# Altium PCB Socket.PcbDoc
Units mil, origin at the board's own origin, x right, y up, seen from the top; angles counter-clockwise.
Board outline 10039.37 x 4309.29 mil, 2 copper layers (Top Layer, Bottom Layer); 56 components, 65 nets, 543 pads, 0 vias.
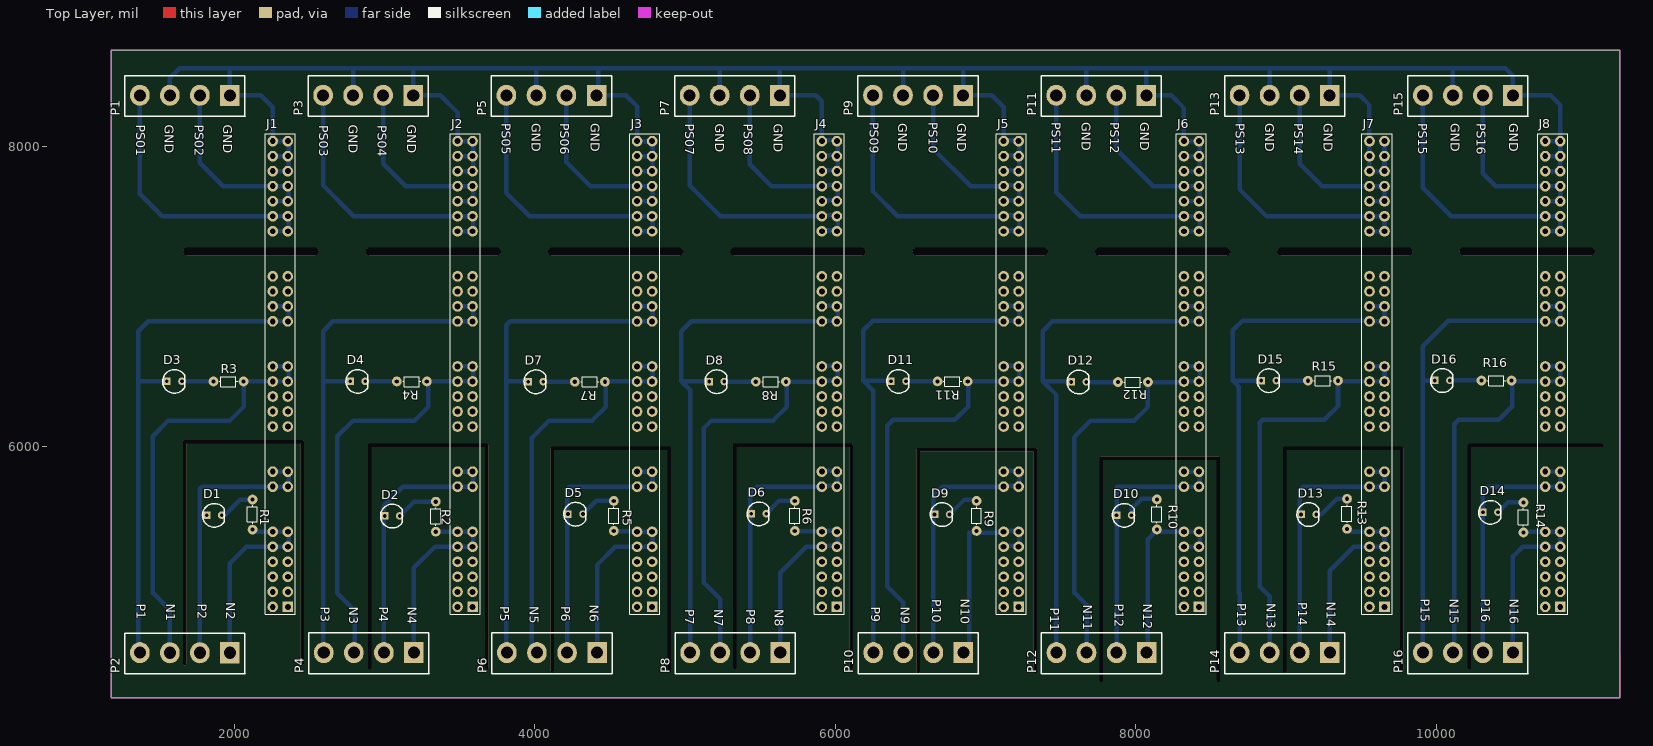
[diagram p0: Top Layer view]
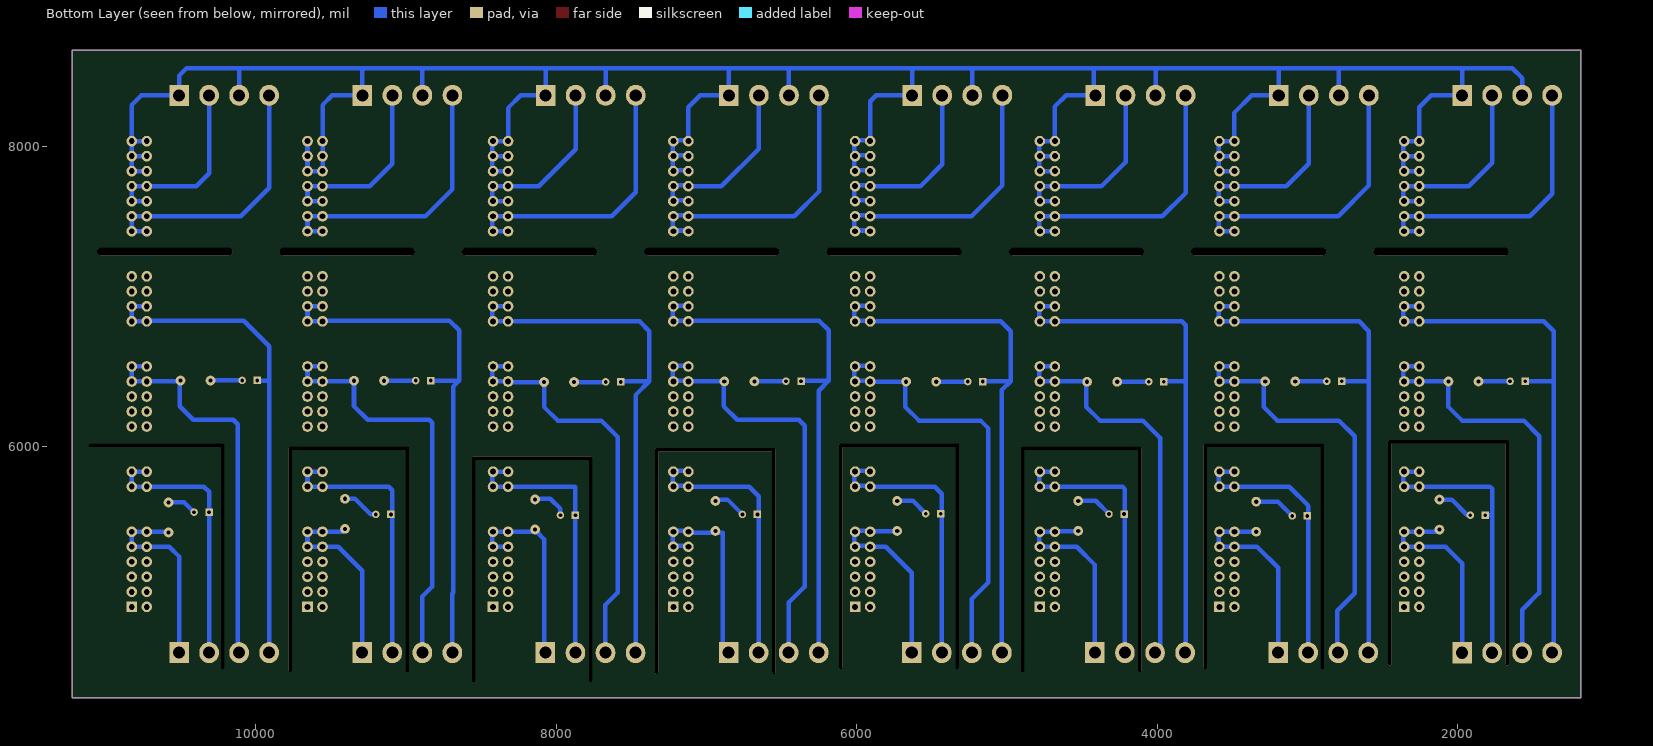
[diagram p1: Bottom Layer view, seen from below]

## Layer stack, top to bottom
Top Solder: solder mask 0.4, Solder Resist, Dk 3.5
Top Layer: signal copper 1.4
Dielectric 1: dielectric 12.6, FR-4, Dk 4.8
Bottom Layer: signal copper 1.4
Bottom Solder: solder mask 0.4, Solder Resist, Dk 3.5

## Board outline
1181.1,4330.71 1181.1,8640 11220.47,8640 11220.47,4330.71

## Design rules (kind name [scope] priority, off if disabled: settings)
Clearance [All] p1: gap=20 ignorepadtopadclearanceinfootprint=FALSE except(0: Arc-Hole Track-Hole SMDPad-Hole THPad-Hole Via-Hole Fill-Hole Poly-Hole Region-Hole Text-Hole)
PolygonConnect [All] p1: connectstyle=Relief reliefconductorwidth=10 reliefentries=4 polygonreliefangle="45 Angle" airgapwidth=10
RoutingVias [All] p1: holewidth=28 width=50 viastyle="Through Hole" minholewidth=28 minwidth=50 maxholewidth=28 maxwidth=50
SolderMaskExpansion [All] p1: expansion=4
Width [All] p1: maxlimit=100 minlimit=10 preferedwidth=30
30 further rules are at their usual default settings.

## Components (designator, comment, footprint, x,y, rotation, side; value= is the part's Value field where it differs from the comment)
D1 "LED 3mm" "Led 3mm" 1815,5545 r0 top
D2 "LED 3mm" "Led 3mm" 3000,5540 r0 top
D3 "LED 3mm" "Led 3mm" 1550,6436.33 r0 top
D4 "LED 3mm" "Led 3mm" 2770,6436.33 r0 top
D5 "LED 3mm" "Led 3mm" 4220,5552.67 r0 top
D6 "LED 3mm" "Led 3mm" 5440,5555 r0 top
D7 "LED 3mm" "Led 3mm" 3955,6434 r0 top
D8 "LED 3mm" "Led 3mm" 5160,6434.67 r0 top
D9 "LED 3mm" "Led 3mm" 6660,5550 r0 top
D10 "LED 3mm" "Led 3mm" 7871.43,5545 r0 top
D11 "LED 3mm" "Led 3mm" 6370,6436.67 r0 top
D12 "LED 3mm" "Led 3mm" 7570,6432.33 r0 top
D13 "LED 3mm" "Led 3mm" 9100,5550 r0 top
D14 "LED 3mm" "Led 3mm" 10310,5565 r0 top
D15 "LED 3mm" "Led 3mm" 8835,6441.33 r0 top
D16 "LED 3mm" "Led 3mm" 9990,6442 r0 top
J1 "Header 32x2" Header32x2 2355,4935 r90 top
J2 "Header 32x2" Header32x2 3585,4935 r90 top
J3 "Header 32x2" Header32x2 4780,4935 r90 top
J4 "Header 32x2" Header32x2 6010,4935 r90 top
J5 "Header 32x2" Header32x2 7220,4935 r90 top
J6 "Header 32x2" Header32x2 8420,4935 r90 top
J7 "Header 32x2" Header32x2 9655,4935 r90 top
J8 "Header 32x2" Header32x2 10825,4935 r90 top
P1 "Header 4" CON4#1 1970,8340 r180 top
P2 "Header 4" CON4#2 1970,4629.29 r180 top
P3 "Header 4" CON4#1 3190,8340 r180 top
P4 "Header 4" CON4#1 3194.29,4630 r180 top
P5 "Header 4" CON4#1 4410,8340 r180 top
P6 "Header 4" CON4#1 4413.57,4630 r180 top
P7 "Header 4" CON4#1 5630,8340 r180 top
P8 "Header 4" CON4#1 5632.86,4630 r180 top
P9 "Header 4" CON4#1 6850,8340 r180 top
P10 "Header 4" CON4#1 6852.14,4630 r180 top
P11 "Header 4" CON4#1 8070,8340 r180 top
P12 "Header 4" CON4#1 8071.43,4630 r180 top
P13 "Header 4" CON4#1 9290,8340 r180 top
P14 "Header 4" CON4#1 9290.71,4630 r180 top
P15 "Header 4" CON4#1 10510,8340 r180 top
P16 "Header 4" CON4#1 10510,4630 r180 top
R1 "Res1" R1/8W 2120.47,5549.03 r90 top
R2 "Res1" R1/8W 3340,5535 r90 top
R3 "Res1" R1/8W 1960.47,6435.36 r180 top
R4 "Res1" R1/8W 3180.47,6435.36 r180 top
R5 "Res1" R1/8W 4525,5540 r90 top
R6 "Res1" R1/8W 5730,5540 r90 top
R7 "Res1" R1/8W 4365.47,6433.03 r180 top
R8 "Res1" R1/8W 5570.47,6433.69 r180 top
R9 "Res1" R1/8W 6940,5540 r90 top
R10 "Res1" R1/8W 8140,5550 r90 top
R11 "Res1" R1/8W 6780.47,6435.69 r180 top
R12 "Res1" R1/8W 7980.47,6431.36 r180 top
R13 "Res1" R1/8W 9405.47,5554.03 r90 top
R14 "Res1" R1/8W 10580,5530 r90 top
R15 "Res1" R1/8W 9245.47,6440.36 r180 top
R16 "Res1" R1/8W 10400.47,6441.03 r180 top

## Footprints (in the part's own frame and the unit in brackets; to place one, negate y for a bottom-side part, rotate by r counter-clockwise, add the part's x,y. Pads: shape width x height; smd on the part's side, far side on the other; paste and mask are expansions set on the pad)
CON4#1 [mil] "CON4 5.08"
  rect 130x140 hole 80: 1(0,0)
  oval 130x140 hole 80: 2(200,0) 3(400,0) 4(600,0)
  silkscreen extent -101,-131 700,141
CON4#2 [mil] "CON4 5.08"
  rect 130x140 hole 80: 1(0,0)
  oval 130x140 hole 80: 2(200,0) 3(400,0) 4(600,-0.71)
  silkscreen extent -101,-131 700,141
Header32x2 [mm] "Header32x2 - 16"
  rect 1.8x1.8 hole 1: 1(0,0)
  round 1.8 hole 1: 2(2.54,0) 3(5.08,0) 4(7.62,0) 5(10.16,0) 6(12.7,0) 9(20.32,0) 10(22.86,0) 13(30.48,0) 14(33.02,0) 15(35.56,0) 16(38.1,0) 17(40.64,0) 20(48.26,0) 21(50.8,0) 22(53.34,0) 23(55.88,0) 26(63.5,0) 27(66.04,0) 28(68.58,0) 29(71.12,0) 30(73.66,0) 31(76.2,0) 32(78.74,0) 33(0,2.54) 34(2.54,2.54) 35(5.08,2.54) 36(7.62,2.54) 37(10.16,2.54) 38(12.7,2.54) 41(20.32,2.54) 42(22.86,2.54) 45(30.48,2.54) 46(33.02,2.54) 47(35.56,2.54) 48(38.1,2.54) 49(40.64,2.54) 52(48.26,2.54) 53(50.8,2.54) 54(53.34,2.54) 55(55.88,2.54) 58(63.5,2.54) 59(66.04,2.54) 60(68.58,2.54) 61(71.12,2.54) 62(73.66,2.54) 63(76.2,2.54) 64(78.74,2.54)
  silkscreen extent -1.27,-1.27 80.01,3.81
"Led 3mm" [mil]
  rect 50x50 hole 25: 1(0,0)
  round 50 hole 25: 2(100,0)
  silkscreen extent -28,-80 118,78
R1/8W [mil] "R 1/8W, 2 pin, 200mil"
  round 65 hole 28: 1(-100,0) 2(100,0)
  silkscreen extent -60,-32 61,34, body extent -135,-35 135,37, height 86

## Part data
D1 D2 D3 D4 D5 D6 D7 D8 D9 D10 D11 D12 D13 D14 D15 D16: library part LED0, "Typical INFRARED GaAs LED"
P1 P2 P3 P4 P5 P6 P7 P8 P9 P10 P11 P12 P13 P14 P15 P16: "Header, 4-Pin"
R1 R2 R3 R4 R5 R6 R7 R8 R9 R10 R11 R12 R13 R14 R15 R16: "Resistor"

## Free pads (board coordinates)
  oval 900x50 hole 50 slot 900 at 0 deg: 0(2110,7300) 0(4537.14,7300) 0(6964.29,7300) 0(9391.43,7300) 1(3323.57,7300) 1(5750.71,7300) 1(8177.86,7300) 1(10605,7300)
  oval 20x1500 hole 20 slot 1500 at 90 deg: 1(1670,5295) 1(2450,5295) 1(2900,5270) 1(3680,5270) 1(4115,5250) 1(4895,5250) 1(5330,5270) 1(6105,5270) 1(6550,5240) 1(7330,5240) 1(7770,5185) 1(8550,5185) 1(8990,5250) 1(9770,5250) 1(10220,5270)
  oval 800x20 hole 20 slot 800 at 0 deg: 1(2060,6035) 1(3290,6010) 1(4505,5990) 1(5715,6010) 1(6940,5980) 1(8160,5925) 1(9380,5990)
  oval 900x20 hole 20 slot 900 at 0 deg: 1(10660,6010)

## Nets (pads, with @x,y where several pads share a name; then routed paths per layer and width w, separated by ;. In a path a pad name is that pad's centre, name@x,y a point inside that pad or via, vN(x,y) a via of type N, cw(c..) or ccw(c..) an arc to the next point about the centre after c; other vN are vias at no path point)
GND: J1.30 J1.31 J1.32 J1.62 J1.63 J1.64 J2.30 J2.31 J2.32 J2.62 J2.63 J2.64 J3.30 J3.31 J3.32 J3.62 J3.63 J3.64 J4.30 J4.31 J4.32 J4.62 J4.63 J4.64 J5.30 J5.31 J5.32 J5.62 J5.63 J5.64 J6.30 J6.31 J6.32 J6.62 J6.63 J6.64 J7.30 J7.31 J7.32 J7.62 J7.63 J7.64 J8.30 J8.31 J8.32 J8.62 J8.63 J8.64 P1.1 P1.3 P3.1 P3.3 P5.1 P5.3 P7.1 P7.3 P9.1 P9.3 P11.1 P11.3 P13.1 P13.3 P15.1 P15.3 | length 20094.3
  Bottom Layer w30: P1.3 1570,8455 1635,8520 1970,8520 ; J1.64 2255,8260 2175,8340 P1.1 1970,8520 ; J1.62@2260,7835 J1.30 2360,7835 J1.31@2360,7935 ; J1.63@2260,7935 J1.31 J1.31@2360,7935 ; J1.64@2260,8035 J1.32 2360,8035 J1.31@2360,7935 ; P3.3 2790,8515 2795,8520 ; 3190,8515 P3.1 3370,8340 3485,8225 J2.64 ; J2.62@3490,7835 J2.30 3590,7835 J2.31@3590,7935 ; J2.63@3490,7935 J2.31 J2.31@3590,7935 ; J2.64@3490,8035 J2.32 3590,8035 J2.31@3590,7935 ; P5.3 4010,8515 4015,8520 ; J3.64 4680,8265 4605,8340 P5.1 4420,8350 4420,8520 ; J3.62@4685,7835 J3.30 4785,7835 J3.31@4785,7935 ; J3.63@4685,7935 J3.31 J3.31@4785,7935 ; J3.64@4685,8035 J3.32 4785,8035 J3.31@4785,7935 ; P7.3 5230,8520 ; J4.64 5910,8300 5870,8340 P7.1 5630,8510 5620,8520 ; J4.62@5915,7840 6015,7840 J4.31@6015,7940 ; J4.63@5915,7940 J4.31@6015,7940 ; J4.64@5915,8040 6015,8040 J4.31@6015,7940 ; P9.3 6450,8515 6455,8520 ; J5.64 7120,8260 7040,8340 P9.1 6850,8515 6855,8520 ; J5.62@7125,7840 7225,7840 J5.31@7225,7940 ; J5.63@7125,7940 J5.31@7225,7940 ; J5.64@7125,8040 7225,8040 J5.31@7225,7940 ; P11.3 7670,8520 ; J6.64 8320,8255 8235,8340 P11.1 8070,8515 8075,8520 ; J6.62@8325,7835 J6.30 8425,7835 J6.31@8425,7935 ; J6.63@8325,7935 J6.31 J6.31@8425,7935 ; J6.64@8325,8035 J6.32 8425,8035 J6.31@8425,7935 ; P13.3 8890,8510 8900,8520 ; J7.32 J7.31 J7.30 J7.62 J7.63 J7.64 9555,8275 9490,8340 P13.1 9290,8505 9275,8520 ; P15.3 10110,8515 10105,8520 ; J8.62 J8.30 J8.31 ; J8.63 J8.31 ; J8.64 J8.32 ; 1970,8520 2795,8520 ; 2795,8520 4015,8520 ; 4015,8520 4420,8520 ; 4420,8520 5230,8520 ; 5230,8520 5620,8520 ; 5620,8520 6455,8520 ; 6455,8520 6855,8520 ; 6855,8520 7670,8520 ; 7670,8520 8075,8520 ; 8075,8520 8900,8520 ; 8900,8520 9275,8520 ; 9275,8520 10105,8520 ; 10105,8520 10460,8520 10510,8470 P15.1 10760,8340 10825,8275 J8.32 ; J8.31 J8.32
N01: J1.16 J1.17 J1.48 J1.49 P2.3 R3.1 | length 2849.3
  Bottom Layer w30: 1455,5025 1455,6070 1560,6175 1970,6175 2060.47,6265.47 R3.1 2254.64,6435.36 J1.48 J1.16@2360,6435 ; 1455,5030.07 1570,4915.07 ; P2.3 1570,4910 ; J1.49@2260,6535 2360,6535 J1.16@2360,6435 ; J1.16 J1.16@2360,6435
N02: J1.5 J1.6 J1.37 J1.38 P2.1 R1.1 | length 1367
  Bottom Layer w30: P2.1 1970,5225 2080,5335 J1.37 ; R1.1 2134.5,5435 J1.38 ; J1.38@2259.69,5434.69 2260,5435 J1.6 2360,5435 2360,5335 J1.5 J1.37@2260,5335
N03: J2.16 J2.17 J2.48 J2.49 P4.3 R4.1 | length 2849.3
  Bottom Layer w30: P4.3@2800,4629.29 2800,4910 2685,5025 2685,6070 2790,6175 3200,6175 3290.47,6265.47 R4.1@3290.47,6435.36 ; R4.1 3484.64,6435.36 J2.48 ; J2.48@3490,6435 J2.16 3590,6435 3590,6535 J2.49@3490,6535
N04: J2.5 J2.6 J2.37 J2.38 P4.1 R2.1 | length 1358.7
  Bottom Layer w30: P4.1 3194.29,5194.29 3335,5335 J2.37 ; R2.1 J2.38 ; J2.38@3489.69,5434.69 3490,5435 J2.6 3590,5435 3590,5335 J2.5 J2.37@3490,5335
N05: J3.16 J3.17 J3.48 J3.49 P6.3 R7.1 | length 2691.5
  Bottom Layer w30: P6.3@3980,4629.29 3980,6060 4095,6175 4380,6175 4470.47,6265.47 R7.1@4470.47,6435.36 ; R7.1 4467.45,6435 J3.48 ; J3.48@4685,6435 J3.16 4785,6435 4785,6535 J3.49@4685,6535
N06: J3.5 J3.6 J3.37 J3.38 P6.1 R5.1 | length 1351.4
  Bottom Layer w30: P6.1 4413.57,5213.57 4535,5335 J3.37 ; R5.1@4530,5436.69 4678.31,5436.69 J3.38 ; J3.38@4684.69,5434.69 4685,5435 J3.6 4785,5435 4785,5335 J3.5 J3.37@4685,5335
N07: J4.16 J4.17 J4.48 J4.49 P8.3 R8.1 | length 2858.3
  Bottom Layer w30: P8.3 5232.86,4987.14 5125,5095 5125,6125 5175,6175 5585,6175 5675.47,6265.47 R8.1@5675.47,6435.36 ; R8.1 5908.69,6433.69 J4.48 ; J4.48@5915,6440 6015,6440 6015,6540 J4.49@5915,6540
N08: J4.5 J4.6 J4.37 J4.38 P8.1 R6.1 | length 1363.8
  Bottom Layer w30: P8.1 5632.86,5162.86 5805,5335 J4.37 ; R6.1 5732.64,5437.36 5907.64,5437.36 J4.38 ; J4.38@5914.69,5439.69 5915,5440 6015,5440 6015,5340 J4.37@5915,5340
N09: J5.16 J5.17 J5.48 J5.49 P10.3 R11.1 | length 2858.6
  Bottom Layer w30: P10.3 6450,4632.14 6450,4965 6345,5070 6345,6140 6385,6180 6795,6180 6885.47,6270.47 R11.1@6885.47,6440.36 ; R11.1 7119.31,6435.69 J5.48 ; J5.48@7125,6440 7225,6440 7225,6540 J5.49@7125,6540
N10: J5.5 J5.6 J5.37 J5.38 P10.1 R9.1 | length 1347.8
  Bottom Layer w30: P10.1 6890,4667.86 6890,5429.36 7114.36,5429.36 J5.38 ; J5.38@7124.69,5439.69 7125,5440 7225,5440 7225,5340 J5.37@7125,5340
N11: J6.16 J6.17 J6.48 J6.49 P12.3 R12.1 | length 2753.2
  Bottom Layer w30: P12.3 7671.43,4948.57 7590,5030 7590,6065 7700,6175 7990,6175 8080.47,6265.47 R12.1@8080.47,6435.36 ; R12.1 8316.36,6431.36 J6.48 ; J6.48@8325,6435 J6.16 8425,6435 8425,6535 J6.49@8325,6535
N12: J6.5 J6.6 J6.37 J6.38 P12.1 R10.1 | length 1319.7
  Bottom Layer w30: P12.1 8080.47,4639.04 8080.47,5385.47 8130.03,5435.03 J6.38 ; J6.38@8324.69,5434.69 8325,5435 J6.6 8425,5435 8425,5335 J6.37@8325,5335
N13: J7.16 J7.17 J7.48 J7.49 P14.3 R15.1 | length 2805.1
  Bottom Layer w30: P14.3 8890.71,5004.29 8825,5070 8825,6160 8845,6180 9255,6180 9345.47,6270.47 R15.1 9350.83,6435 J7.48 J7.16 J7.17 J7.49
N14: J7.5 J7.6 J7.37 J7.38 P14.1 R13.1 | length 1306.5
  Bottom Layer w30: P14.1 9290.71,5175.71 9450,5335 J7.37 J7.5 J7.6 J7.38 R13.1@9424.5,5435
N15: J8.16 J8.17 J8.48 J8.49 P16.3 R16.1 | length 2648
  Bottom Layer w30: P16.3@10120,4634.29 10120,6150 10150,6180 10415,6180 10505.47,6270.47 R16.1@10505.47,6440.36 ; R16.1 10506.5,6435 J8.48 J8.16 J8.17 J8.49
N16: J8.5 J8.6 J8.37 J8.38 P16.1 R14.1 | length 1327.1
  Bottom Layer w30: P16.1 10510,5270 10575,5335 J8.37 J8.5 J8.6 J8.38 10724.69,5434.69 R14.1@10580,5434.69
NetD1_2: D1.2 R1.2 | length 248.6
  Bottom Layer w30: D1.2 1935,5545 2039.03,5649.03 R1.2
NetD2_2: D2.2 R2.2 | length 279.4
  Bottom Layer w30: D2.2 3195,5635 R2.2
NetD3_2: D3.2 R3.2 | length 210.9
  Bottom Layer w30: D3.2 1650.97,6435.36 R3.2
NetD4_2: D4.2 R4.2 | length 210.9
  Bottom Layer w30: D4.2 2870.97,6435.36 R4.2
NetD5_2: D5.2 R5.2 | length 241.2
  Bottom Layer w30: D5.2 4407.33,5640 R5.2
NetD6_2: D6.2 R6.2 | length 225.2
  Bottom Layer w30: D6.2 5625,5640 R6.2
NetD7_2: D7.2 R7.2 | length 210.9
  Bottom Layer w30: D7.2 4264.5,6434 R7.2
NetD8_2: D8.2 R8.2 | length 210.9
  Bottom Layer w30: D8.2 5260.97,6433.69 R8.2
NetD9_2: D9.2 R9.2 | length 221.6
  Bottom Layer w30: D9.2 6859.36,5649.36 R9.2@6940.47,5649.36
NetD10_2: D10.2 R10.2 | length 239.5
  Bottom Layer w30: D10.2 7971.43,5587.43 8039.03,5655.03 R10.2@8140.47,5655.03
NetD11_2: D11.2 R11.2 | length 210.9
  Bottom Layer w30: D11.2 6470.97,6435.69 R11.2
NetD12_2: D12.2 R12.2 | length 210.9
  Bottom Layer w30: D12.2 7670.97,6431.36 R12.2
NetD13_2: D13.2 R13.2 | length 248.6
  Bottom Layer w30: D13.2 9235,5550 9339.03,5654.03 R13.2
NetD14_2: D14.2 R14.2 | length 196.9
  Bottom Layer w30: D14.2 10475,5630 R14.2
NetD15_2: D15.2 R15.2 | length 210.9
  Bottom Layer w30: D15.2 8935.97,6440.36 R15.2
NetD16_2: D16.2 R16.2 | length 210.9
  Bottom Layer w30: D16.2 10299.5,6442 R16.2
P01: D3.1 J1.20 J1.21 J1.52 J1.53 P2.4 | length 3556.1
  Bottom Layer w30: 1360,6436.33 D3.1 ; P2.4 1360,4640 1360,6770 1425,6835 J1.52 ; J1.52@2260,6835 J1.20 2360,6835 2360,6935 J1.53@2260,6935
P02: D1.1 J1.9 J1.10 J1.41 J1.42 P2.2 | length 1921.9
  Bottom Layer w30: P2.2 1770,5720 1785,5735 J1.41 ; 1775,5545 D1.1 ; J1.41@2260,5735 J1.9 2360,5735 2360,5835 J1.42@2260,5835
P03: D4.1 J2.20 J2.21 J2.52 J2.53 P4.4 | length 3541.9
  Bottom Layer w30: P4.4@2590,4640 2590,6770 2655,6835 J2.52 ; 2590,6436.33 D4.1@2780,6436.33 ; J2.52@3490,6835 J2.20 3590,6835 3590,6935 J2.53@3490,6935
P04: D2.1 J2.9 J2.10 J2.41 J2.42 P4.2 | length 1822.1
  Bottom Layer w30: P4.2 2994.29,5609.29 3120,5735 J2.41 ; J2.41@3490,5735 J2.9 3590,5735 3590,5835 J2.42@3490,5835
P05: D7.1 J3.20 J3.21 J3.52 J3.53 P6.4 | length 3501.9
  Bottom Layer w30: P6.4@3770,4640 3810,4680 3810,6810 3835,6835 J3.52@4665,6835 ; 3810,6436.33 D7.1@3960,6436.33 ; J3.52@4685,6835 J3.20 4785,6835 4785,6935 J3.53@4685,6935
P06: D5.1 J3.9 J3.10 J3.41 J3.42 P6.2 | length 1861.8
  Bottom Layer w30: P6.2 4213.57,5718.57 4230,5735 J3.41 ; J3.41@4685,5735 J3.9 4785,5735 4785,5835 J3.42@4685,5835
P07: D8.1 J4.20 J4.21 J4.52 J4.53 P8.4 | length 3575.9
  Bottom Layer w30: P8.4 5032.86,6378.48 4975,6436.33 ; D8.1@5165,6436.33 4975,6436.33 ; 5870,6835 5040,6835 4975,6770 4975,6436.33 ; J4.52@5915,6840 6015,6840 6015,6940 J4.53@5915,6940
P08: D6.1 J4.9 J4.10 J4.41 J4.42 P8.2 | length 1854.5
  Bottom Layer w30: P8.2 5432.86,5687.86 5480,5735 J4.41 ; J4.41@5915,5740 6015,5740 6015,5840 J4.42@5915,5840
P09: D11.1 J5.20 J5.21 J5.52 J5.53 P10.4 | length 3584.7
  Bottom Layer w30: P10.4 6252.14,6374.19 6185,6441.33 ; D11.1@6375,6441.33 6185,6441.33 ; 7080,6840 6250,6840 6185,6775 6185,6441.33 ; J5.52@7125,6840 7225,6840 7225,6940 J5.53@7125,6940
P10: D9.1 J5.9 J5.10 J5.41 J5.42 P10.2 | length 1836
  Bottom Layer w30: P10.2 6652.14,5672.14 6715,5735 J5.41 ; J5.41@7125,5740 7225,5740 7225,5840 J5.42@7125,5840
P11: D12.1 J6.20 J6.21 J6.52 J6.53 P12.4 | length 3589.8
  Bottom Layer w30: P12.4 7471.43,6344.9 7380,6436.33 ; D12.1@7570,6436.33 7380,6436.33 ; 8275,6835 7445,6835 7380,6770 7380,6436.33 ; J6.52@8325,6835 J6.20 8425,6835 8425,6935 J6.53@8325,6935
P12: D10.1 J6.9 J6.10 J6.41 J6.42 P12.2 | length 1851.5
  Bottom Layer w30: P12.2 7871.43,5731.43 7875,5735 J6.41 ; J6.41@8325,5735 J6.9 8425,5735 8425,5835 J6.10 J6.42@8325,5835
P13: D15.1 J7.20 J7.21 J7.52 J7.53 P14.4 | length 3575.9
  Bottom Layer w30: P14.4 8690.71,5024.29 8685,5030 8685,6401.33 8645,6441.33 ; D15.1 8645,6441.33 ; J7.52@9540,6840 8710,6840 8645,6775 8645,6441.33 ; J7.52 J7.20 J7.21 J7.53
P14: D13.1 J7.9 J7.10 J7.41 J7.42 P14.2 | length 1855.1
  Bottom Layer w30: P14.2 9090.71,5710.71 9115,5735 J7.41 J7.9 J7.10 J7.42
P15: D16.1 J8.20 J8.21 J8.52 J8.53 P16.4 | length 3285.4
  Bottom Layer w30: P16.4 9910,6670 10080,6840 J8.52@10700,6840 ; 9910,6441.33 D16.1@9995,6441.33 ; J8.52 J8.20 J8.21 J8.53
P16: D14.1 J8.9 J8.10 J8.41 J8.42 P16.2 | length 1799.5
  Bottom Layer w30: P16.2 10310,5344.22 10310,5700 10345,5735 J8.41 J8.9 J8.10 J8.42
PS01: J1.26 J1.27 J1.58 J1.59 P1.4 | length 1902.1
  Bottom Layer w30: P1.4 1370,7685 1520,7535 J1.59 ; J1.58@2260,7435 2360,7435 2360,7535 J1.27 J1.59@2260,7535
PS02: J1.28 J1.29 J1.60 J1.61 P1.2 | length 1299.2
  Bottom Layer w30: P1.2 1770,7890 1925,7735 J1.61 ; J1.60@2260,7635 2360,7635 2360,7735 J1.29 J1.61@2260,7735
PS03: J2.26 J2.27 J2.58 J2.59 P3.4 | length 1879.9
  Bottom Layer w30: P3.4 2590,7740 2795,7535 J2.59 ; J2.58@3490,7435 3590,7435 3590,7535 J2.27 J2.59@3490,7535
PS04: J2.28 J2.29 J2.60 J2.61 P3.2 | length 1312.1
  Bottom Layer w30: P3.2 2990,7885 3140,7735 J2.61 ; J2.60@3490,7635 3590,7635 3590,7735 J2.29 J2.61@3490,7735
PS05: J3.26 J3.27 J3.58 J3.59 P5.4 | length 1884.2
  Bottom Layer w30: P5.4 3810,7690 3965,7535 J3.59 ; J3.58@4685,7435 4785,7435 4785,7535 J3.27 J3.59@4685,7535
PS06: J3.28 J3.29 J3.60 J3.61 P5.2 | length 1281.3
  Bottom Layer w30: P5.2 4210,7895 4370,7735 J3.61 ; J3.60@4685,7635 4785,7635 4785,7735 J3.29 J3.61@4685,7735
PS07: J4.26 J4.27 J4.58 J4.59 P7.4 | length 1864.9
  Bottom Layer w30: P7.4 5030,7740 5235,7535 J4.59 ; J4.58@5915,7440 6015,7440 6015,7540 J4.59@5915,7540
PS08: J4.28 J4.29 J4.60 J4.61 P7.2 | length 1300.1
  Bottom Layer w30: P7.2 5430,7880 5575,7735 J4.61 ; J4.60@5915,7640 6015,7640 6015,7740 J4.61@5915,7740
PS09: J5.26 J5.27 J5.58 J5.59 P9.4 | length 1878.3
  Bottom Layer w30: P9.4 6250,7700 6415,7535 J5.59 ; J5.58@7125,7440 7225,7440 7225,7540 J5.59@7125,7540
PS10: J5.28 J5.29 J5.60 J5.61 P9.2 | length 1228.6
  Bottom Layer w30: P9.2 6650,7985 6900,7735 J5.61 ; J5.60@7125,7640 7225,7640 7225,7740 J5.61@7125,7740
PS11: J6.26 J6.27 J6.58 J6.59 P11.4 | length 1861.3
  Bottom Layer w30: P11.4 7470,7695 7630,7535 J6.59 ; J6.58@8325,7435 8425,7435 8425,7535 J6.27 J6.59@8325,7535
PS12: J6.28 J6.29 J6.60 J6.61 P11.2 | length 1211.5
  Bottom Layer w30: P11.2 7870,7980 8115,7735 J6.61 ; J6.60@8325,7635 8425,7635 8425,7735 J6.29 J6.61@8325,7735
PS13: J7.26 J7.27 J7.58 J7.59 P13.4 | length 1864.6
  Bottom Layer w30: P13.4 8690,7715 8870,7535 J7.59 J7.27 J7.26 J7.58
PS14: J7.28 J7.29 J7.60 J7.61 P13.2 | length 1282.1
  Bottom Layer w30: P13.2 9090,7885 9240,7735 J7.61 J7.29 J7.28 J7.60
PS15: J8.26 J8.27 J8.58 J8.59 P15.4 | length 1808.7
  Bottom Layer w30: P15.4 9910,7725 10100,7535 J8.59 J8.27 J8.26 J8.58
PS16: J8.28 J8.29 J8.60 J8.61 P15.2 | length 1270.2
  Bottom Layer w30: P15.2 10310,7820 10395,7735 J8.61 J8.29 J8.28 J8.60
pads on no net: J1.1 J1.2 J1.3 J1.4 J1.13 J1.14 J1.15 J1.22 J1.23 J1.33 J1.34 J1.35 J1.36 J1.45 J1.46 J1.47 J1.54 J1.55 J2.1 J2.2 J2.3 J2.4 J2.13 J2.14 J2.15 J2.22 J2.23 J2.33 J2.34 J2.35 J2.36 J2.45 J2.46 J2.47 J2.54 J2.55 J3.1 J3.2 J3.3 J3.4 J3.13 J3.14 J3.15 J3.22 J3.23 J3.33 J3.34 J3.35 J3.36 J3.45 J3.46 J3.47 J3.54 J3.55 J4.1 J4.2 J4.3 J4.4 J4.13 J4.14 J4.15 J4.22 J4.23 J4.33 J4.34 J4.35 J4.36 J4.45 J4.46 J4.47 J4.54 J4.55 J5.1 J5.2 J5.3 J5.4 J5.13 J5.14 J5.15 J5.22 J5.23 J5.33 J5.34 J5.35 J5.36 J5.45 J5.46 J5.47 J5.54 J5.55 J6.1 J6.2 J6.3 J6.4 J6.13 J6.14 J6.15 J6.22 J6.23 J6.33 J6.34 J6.35 J6.36 J6.45 J6.46 J6.47 J6.54 J6.55 J7.1 J7.2 J7.3 J7.4 J7.13 J7.14 J7.15 J7.22 J7.23 J7.33 J7.34 J7.35 J7.36 J7.45 J7.46 J7.47 J7.54 J7.55 J8.1 J8.2 J8.3 J8.4 J8.13 J8.14 J8.15 J8.22 J8.23 J8.33 J8.34 J8.35 J8.36 J8.45 J8.46 J8.47 J8.54 J8.55
copper on no net: | length 300
  Top Layer w10: 11221.1,4330.71 11221.1,4630.71

## Keep-outs
Keep-Out Layer:
  the board outline again, w10

## Silkscreen, mask and mechanical layers (free items; w line width, h text height)
Top Overlay:
  text "PS09" at 6230,8160 h60 r270
  text "PS10" at 6620,8160 h60 r270
  text "PS11" at 7440,8160 h60 r270
  text "GND" at 7640,8160 h60 r270
  text "PS12" at 7830,8160 h60 r270
  text "GND" at 8030,8160 h60 r270
  text "PS05" at 3780,8155 h60 r270
  text "GND" at 3980,8155 h60 r270
  text "PS06" at 4170,8155 h60 r270
  text "GND" at 4370,8155 h60 r270
  text "GND" at 6420,8155 h60 r270
  text "GND" at 6810,8155 h60 r270
  text "PS13" at 8665,8155 h60 r270
  text "GND" at 8860,8155 h60 r270
  text "PS14" at 9055,8155 h60 r270
  text "GND" at 9250,8155 h60 r270
  text "PS15" at 9880,8155 h60 r270
  text "GND" at 10095,8155 h60 r270
  text "PS16" at 10270,8155 h60 r270
  text "GND" at 10485,8155 h60 r270
  text "PS07" at 5000,8150 h60 r270
  text "GND" at 5200,8150 h60 r270
  text "PS08" at 5390,8150 h60 r270
  text "GND" at 5590,8150 h60 r270
  text "PS01" at 1345,8145 h60 r270
  text "GND" at 1535,8145 h60 r270
  text "PS02" at 1735,8145 h60 r270
  text "GND" at 1925,8145 h60 r270
  text "GND" at 2760,8145 h60 r270
  text "GND" at 3150,8145 h60 r270
  text "PS03" at 2565,8140 h60 r270
  text "PS04" at 2955,8140 h60 r270
  text "N10" at 6835,4990 h60 r270
  text "P15" at 9895,4990 h60 r270
  text "N15" at 10090,4990 h60 r270
  text "P16" at 10300,4990 h60 r270
  text "N16" at 10490,4990 h60 r270
  text "P10" at 6645,4985.04 h60 r270
  text "N14" at 9270,4970 h60 r270
  text "N2" at 1945,4965 h60 r270
  text "P14" at 9080,4965.04 h60 r270
  text "P13" at 8675,4960 h60 r270
  text "N13" at 8870,4960 h60 r270
  text "P1" at 1350,4955.06 h60 r270
  text "N1" at 1545,4955.06 h60 r270
  text "P2" at 1755,4955.06 h60 r270
  text "P12" at 7860,4955.04 h60 r270
  text "N12" at 8050,4955 h60 r270
  text "N6" at 4365,4950 h60 r270
  text "N11" at 7650,4950 h60 r270
  text "P5" at 3770,4940.06 h60 r270
  text "N5" at 3965,4940.06 h60 r270
  text "P6" at 4175,4940.06 h60 r270
  text "P3" at 2575,4935.02 h60 r270
  text "N3" at 2765,4935.02 h60 r270
  text "P4" at 2965,4935.02 h60 r270
  text "N4" at 3155,4935.02 h60 r270
  text "P9" at 6240,4935.06 h60 r270
  text "N9" at 6435,4935.06 h60 r270
  text "P11" at 7430,4930.06 h60 r270
  text "P7" at 5000,4920.06 h60 r270
  text "N7" at 5195,4920.06 h60 r270
  text "P8" at 5405,4920.06 h60 r270
  text "N8" at 5595,4920 h60 r270